# Allegro board imu_breakout.brd
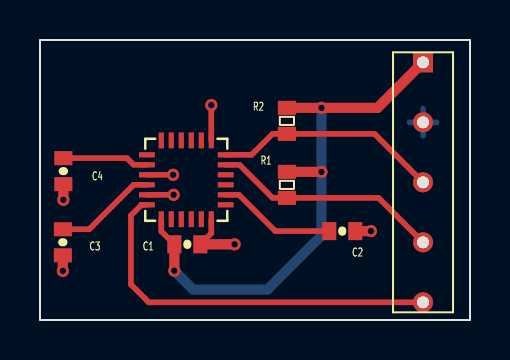
[diagram p0: board, top side]
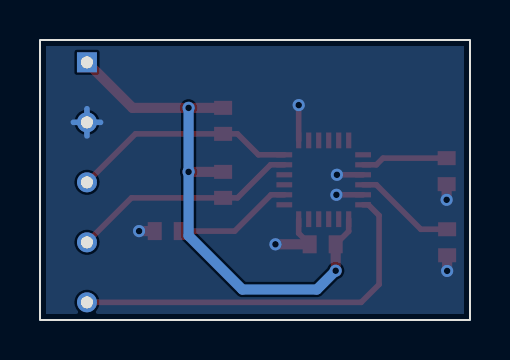
[diagram p1: board, bottom side, seen from below]

Outline 21.5 x 14 mm; copper layers: TOP, BOTTOM. Coordinates in mm from the lower left corner of the outline.
Outline path: rectangle 0,0 21.5,14

## Design rules (mm)
constraint set DEFAULT: min track width 0.281

## Placement (name value [footprint] x y rotation side)
C1  0.1uF  [0402-CAP]  7.37 3.78 0 top
C2  2.2nF  [0402-CAP]  15.11 4.45 0 top
C3  0.1uF  [0402-CAP]  1.14 3.89 270 top
C4  10nF  [0402-CAP]  1.17 7.44 270 top
JP1  imu_breakout  [IMU_BREAKOUT]  19.15 6.88 0 top
NOREF  -  []  21.5 0 90 top
NOREF#2  -  []  -20.35 -111.46 0 top
NOREF#3  -  []  0 14 0 top
R1  10k  [0402-RES]  12.34 6.76 270 top
R2  10k  [0402-RES]  12.34 9.96 270 top
U1  MPU-6050  [QFN50P400X400X95-24N]  7.32 7.01 270 top

## Library data of the parts
C1-C4 = CAP NP
JP1 = imu_breakout
R1 R2 = R
U1 = MPU-6050

## Footprints (pads in the part's own frame, mm; a bottom-side part is the same pattern mirrored in y, then rotated)
0402-CAP
  rect 0.7x0.9 smd: 1(-0.65,0) 2(0.65,0)
0402-RES
  rect 0.7x0.9 smd: 1(-0.65,0) 2(0.65,0)
IMU_BREAKOUT
  rect 1x1 hole 0.6: 1(0,6)
  round 1 hole 0.6: 2(0,3) 3(0,0) 4(0,-3) 5(0,-6)
QFN50P400X400X95-24N
  rect 0.79x0.26 smd: 1(-1.97,1.25) 2(-1.97,0.75) 3(-1.97,0.25) 4(-1.97,-0.25) 5(-1.97,-0.75) 6(-1.97,-1.25) 13(1.97,-1.25) 14(1.97,-0.75) 15(1.97,-0.25) 16(1.97,0.25) 17(1.97,0.75) 18(1.97,1.25)
  rect 0.26x0.79 smd: 7(-1.25,-1.97) 8(-0.75,-1.97) 9(-0.25,-1.97) 10(0.25,-1.97) 11(0.75,-1.97) 12(1.25,-1.97) 19(1.25,1.97) 20(0.75,1.97) 21(0.25,1.97) 22(-0.25,1.97) 23(-0.75,1.97) 24(-1.25,1.97)

## Nets
GND: C1.2 C2.2 C3.2 C4.2 JP1.2 U1.1 U1.9 U1.11 U1.18
VDD: C1.1 JP1.1(VDD) R1.1 R2.1 U1.13
INT: JP1.5 U1.12
SCL: JP1.4 R1.2 U1.23
SDA: JP1.3 R2.2 U1.24
N00407: C2.1 U1.20
N00463: C3.1 U1.10
N00662: C4.1 U1.8(VLOGIC)

Pads without a net: U1 2 3 4 5 6 7 14 15 16 17 19 21 22

## Via types
v1: diameter 0.61, hole 0.33, TOP to BOTTOM, 10 vias

## Routing (per net, layer and track width the routed paths; a pad name or vN(x,y) marks a point on that pad's centre or on a via; arc(x,y) is an arc through that point)
GND: length 12.7
  TOP w0.281: U1.11 v1(6.68,6.26) ; U1.9 v1(6.65,7.26) ; U1.1 v1(8.57,10.74) ; U1.18 8.57,4.33 C1.2
  TOP w0.508: C2.2 v1(16.54,4.45) ; C4.2 v1(1.17,6.01) ; C1.2 v1(9.73,3.78) ; C3.2 v1(1.14,2.45)
  BOTTOM w0.281: JP1.2 19.15,10.56 ; JP1.2 19.15,9.21 ; JP1.2 19.83,9.88 ; JP1.2 18.47,9.88
VDD: length 27.6
  TOP w0.281: C1.1 6.07,4.44 U1.13
  TOP w0.508: C1.1 v1(6.72,2.46) ; R1.1 v1(14.07,7.41) ; JP1.1 16.88,10.61 v1(14.07,10.61) R2.1
  BOTTOM w0.508: v1(14.07,10.61) v1(14.07,7.41) 14.07,4.22 11.38,1.52 7.66,1.52 v1(6.72,2.46)
INT: length 19.4
  TOP w0.281: U1.12 5.08,5.76 4.55,5.23 4.55,1.78 5.44,0.88 JP1.5
SCL: length 11.5
  TOP w0.281: U1.23 9.97,7.76 11.63,6.11 R1.2 16.93,6.11 JP1.4
SDA: length 11.3
  TOP w0.281: U1.24 10.58,8.26 11.63,9.31 R2.2 16.73,9.31 JP1.3
N00407: length 5.9
  TOP w0.281: U1.20 9.95,6.26 11.76,4.45 C2.1
N00463: length 5.1
  TOP w0.281: U1.10 4.68,6.76 2.46,4.54 C3.1
N00662: length 4.3
  TOP w0.281: C4.1 4.35,8.09 4.68,7.76 U1.8

## Copper pours and planes (outline as drawn; the poured copper is in the pictures)
GND on BOTTOM: 0.3,13.7 21.2,13.7 21.2,0.3 0.3,0.3

## Text on the board
XSECTION_CHART: *  SURFACE | L1 TOP CONDUCTOR | *  DIELECTRIC | L2 BOTTOM CONDUCTOR | DESIGN CROSS SECTION CHART | ___________________________ | TOTAL THICKNESS 0.26416 MM | 1-2
DIMENSION: FIGURE | FINISHED_SIZE | 0.3302 | 0.5999 | DRILL CHART: TOP to BOTTOM | ALL UNITS ARE IN MILLIMETERS | TOLERANCE_DRILL | +0.0/-0.0 | +0.05/-0.05 | PLATED | QTY | 12 | 5
